# EAGLE board IR_LED_PD (EAGLE 9.7.0)
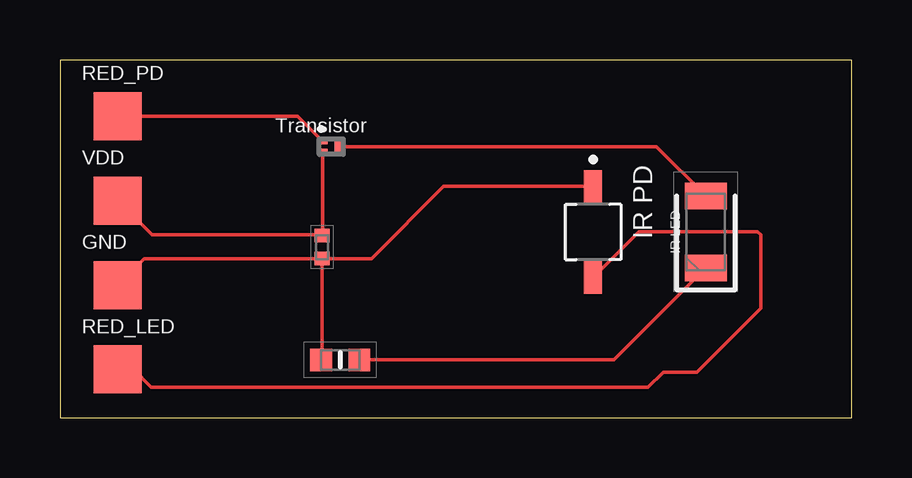
[diagram p0: board, top side]

Size 33 x 14.91 mm. Coordinates in mm from the lower left corner, seen from the top.
Outline: 0,0 33,0 33,14.91 0,14.91 0,0
Copper layers (1*16): Top / Bottom
Stack-up Default Layer Stack: Top User Defined 0.035mm / Dielectric-1 User Defined 1.5mm / Bottom User Defined 0.035mm
Design rules "default": minimum track width 6mil, minimum drill 0.35mm, track to track 6mil, track to pad 6mil, pad to pad 6mil, via to via 6mil, smd to smd 6mil, copper to edge 40mil, drill to drill 6mil, minimum pad ring 10mil, minimum via ring 8mil, stop-mask expansion 4mil, vias tented up to drill 0mil, thermal gap 10mil

## Footprints (pad centres in the part's own frame; a part is rotated, then mirrored left to right if it is on the bottom)
CAPC1005X55N = smd 0.56 x 0.62: 1 -0.48,1.27; 2 0.48,1.27
XDCR_VEMD2023X01 = smd 1.35 x 0.75: A 1.9,0; C -1.9,0
PAD = smd 2 x 2: PAD 0,0
LEDC3216X180N = smd 1.1 x 1.75: 1 -1.5,0; 2 1.5,0
SOT883B = smd 0.4 x 0.25: 1 -0.35,0.225; 2 -0.35,-0.225 | smd 0.4 x 0.7: 3 0.35,0
RESC1608X55N = smd 0.9 x 0.95: 1 -0.8,0; 2 0.8,0

## Placement (x,y rotation side)
C1  CAPACITOR-12PF  [CAPC1005X55N]  12.19,7.11 90 top
D1  IRPD  [XDCR_VEMD2023X01]  22.23,7.75 270 top
GND  PAD  [PAD]  2.41,5.54 0 top
LED1  IRLED  [LEDC3216X180N]  26.92,7.75 90 top
Q1  TRANSISTOR  [SOT883B]  11.3,11.3 0 top
R1  RESISTOR-100OHM  [RESC1608X55N]  11.68,2.41 0 top
RED_LED  PAD  [PAD]  2.41,2.02 0 top
RED_PD  PAD  [PAD]  2.41,12.57 0 top
VDD  PAD  [PAD]  2.41,9.05 0 top

## Library data of the parts
C1 = MABOS_Library; DESCRIPTION: Multilayer Ceramic Capacitors MLCC - SMD/SMT 12pF 2% 25V C0G; HEIGHT: 0.55mm; MANUFACTURER_NAME: Kemet; MANUFACTURER_PART_NUMBER: C0402C120G3GACTU; MOUSER_PART_NUMBER: 80-C0402C120G3G; MOUSER_PRICE-STOCK: https://www.mouser.com/Search/Refine.aspx?Keyword=80-C0402C120G3G
D1 = MABOS_Library; AVAILABILITY: In Stock; DESCRIPTION: Photodiode 940nm 100ns 70° 2-SMD; MF: Vishay Semiconductor; MP: VEMD2023X01; PACKAGE: SMD-2 Vishay Semiconductor; PRICE: None; PURCHASE-URL: https://pricing.snapeda.com/search/part/VEMD2023X01/?ref=eda
GND RED_LED RED_PD VDD = Nordic_BLE
LED1 = MABOS_Library; DESCRIPTION: Infrared Emitters 3.2x1.6mm IR SMD LED; HEIGHT: 1.8mm; MANUFACTURER_NAME: Kingbright; MANUFACTURER_PART_NUMBER: APTD3216F3C-P22; MOUSER_PART_NUMBER: 604-APTD3216F3C-P22; MOUSER_PRICE-STOCK: https://www.mouser.co.uk/ProductDetail/Kingbright/APTD3216F3C-P22?qs=fAHHVMwC%252Bbjo55EMkwMBzg%3D%3D
Q1 = MABOS_Library; DESCRIPTION: Bipolar Transistors - BJT 45V NPN 100mA 250mW; HEIGHT: mm; MANUFACTURER_NAME: Nexperia; MANUFACTURER_PART_NUMBER: BC847BMB,315; MOUSER_PART_NUMBER: 771-BC847BMB315; MOUSER_PRICE-STOCK: https://www.mouser.co.uk/ProductDetail/Nexperia/BC847BMB315?qs=5C9Q4QJFsuN7bUmIcU4LYw%3D%3D
R1 = MABOS_Library; DESCRIPTION: Thick Film Resistors - SMD 100 OHM .1% 50PPM; HEIGHT: 0.55mm; MANUFACTURER_NAME: KOA Speer; MANUFACTURER_PART_NUMBER: RS73G1JTTD1000B; MOUSER_PART_NUMBER: 660-RS73G1JTTD1000B; MOUSER_PRICE-STOCK: https://www.mouser.co.uk/ProductDetail/KOA-Speer/RS73G1JTTD1000B/?qs=GBLSl2AkiruQBcK7exZ%252Bcg%3D%3D

## Nets
GND: C1.1 D1.C GND.PAD R1.1
IR_LED: Q1.1 RED_PD.PAD
IR_PD: D1.A RED_LED.PAD
N$2: LED1.2 Q1.3
N$3: LED1.1 R1.2
VDD: C1.2 Q1.2 VDD.PAD

## Tracks (layer width: path | path; a pad name or v marks a point on that pad's centre or on a via)
GND
  Top 0.152: GND.PAD 3.51,6.63 C1.1 | C1.1 10.92,2.45 R1.1 | C1.1 12.98,6.63 16,9.65 D1.C
IR_LED
  Top 0.152: RED_PD.PAD 9.91,12.57 Q1.1
IR_PD
  Top 0.152: RED_LED.PAD 3.06,2.02 3.81,1.27 24.51,1.27 25.15,1.91 26.54,1.91 29.21,4.57 29.21,7.62 29.08,7.75 24.12,7.75 D1.A
N$2
  Top 0.152: Q1.3 24.87,11.3 LED1.2
N$3
  Top 0.152: R1.2 23.09,2.41 LED1.1
VDD
  Top 0.152: Q1.2 10.95,7.62 | 10.95,7.62 C1.2 | VDD.PAD 3.84,7.62 10.95,7.62